# EAGLE board led_board_robot_vs_v2_final (EAGLE 8.0.1)
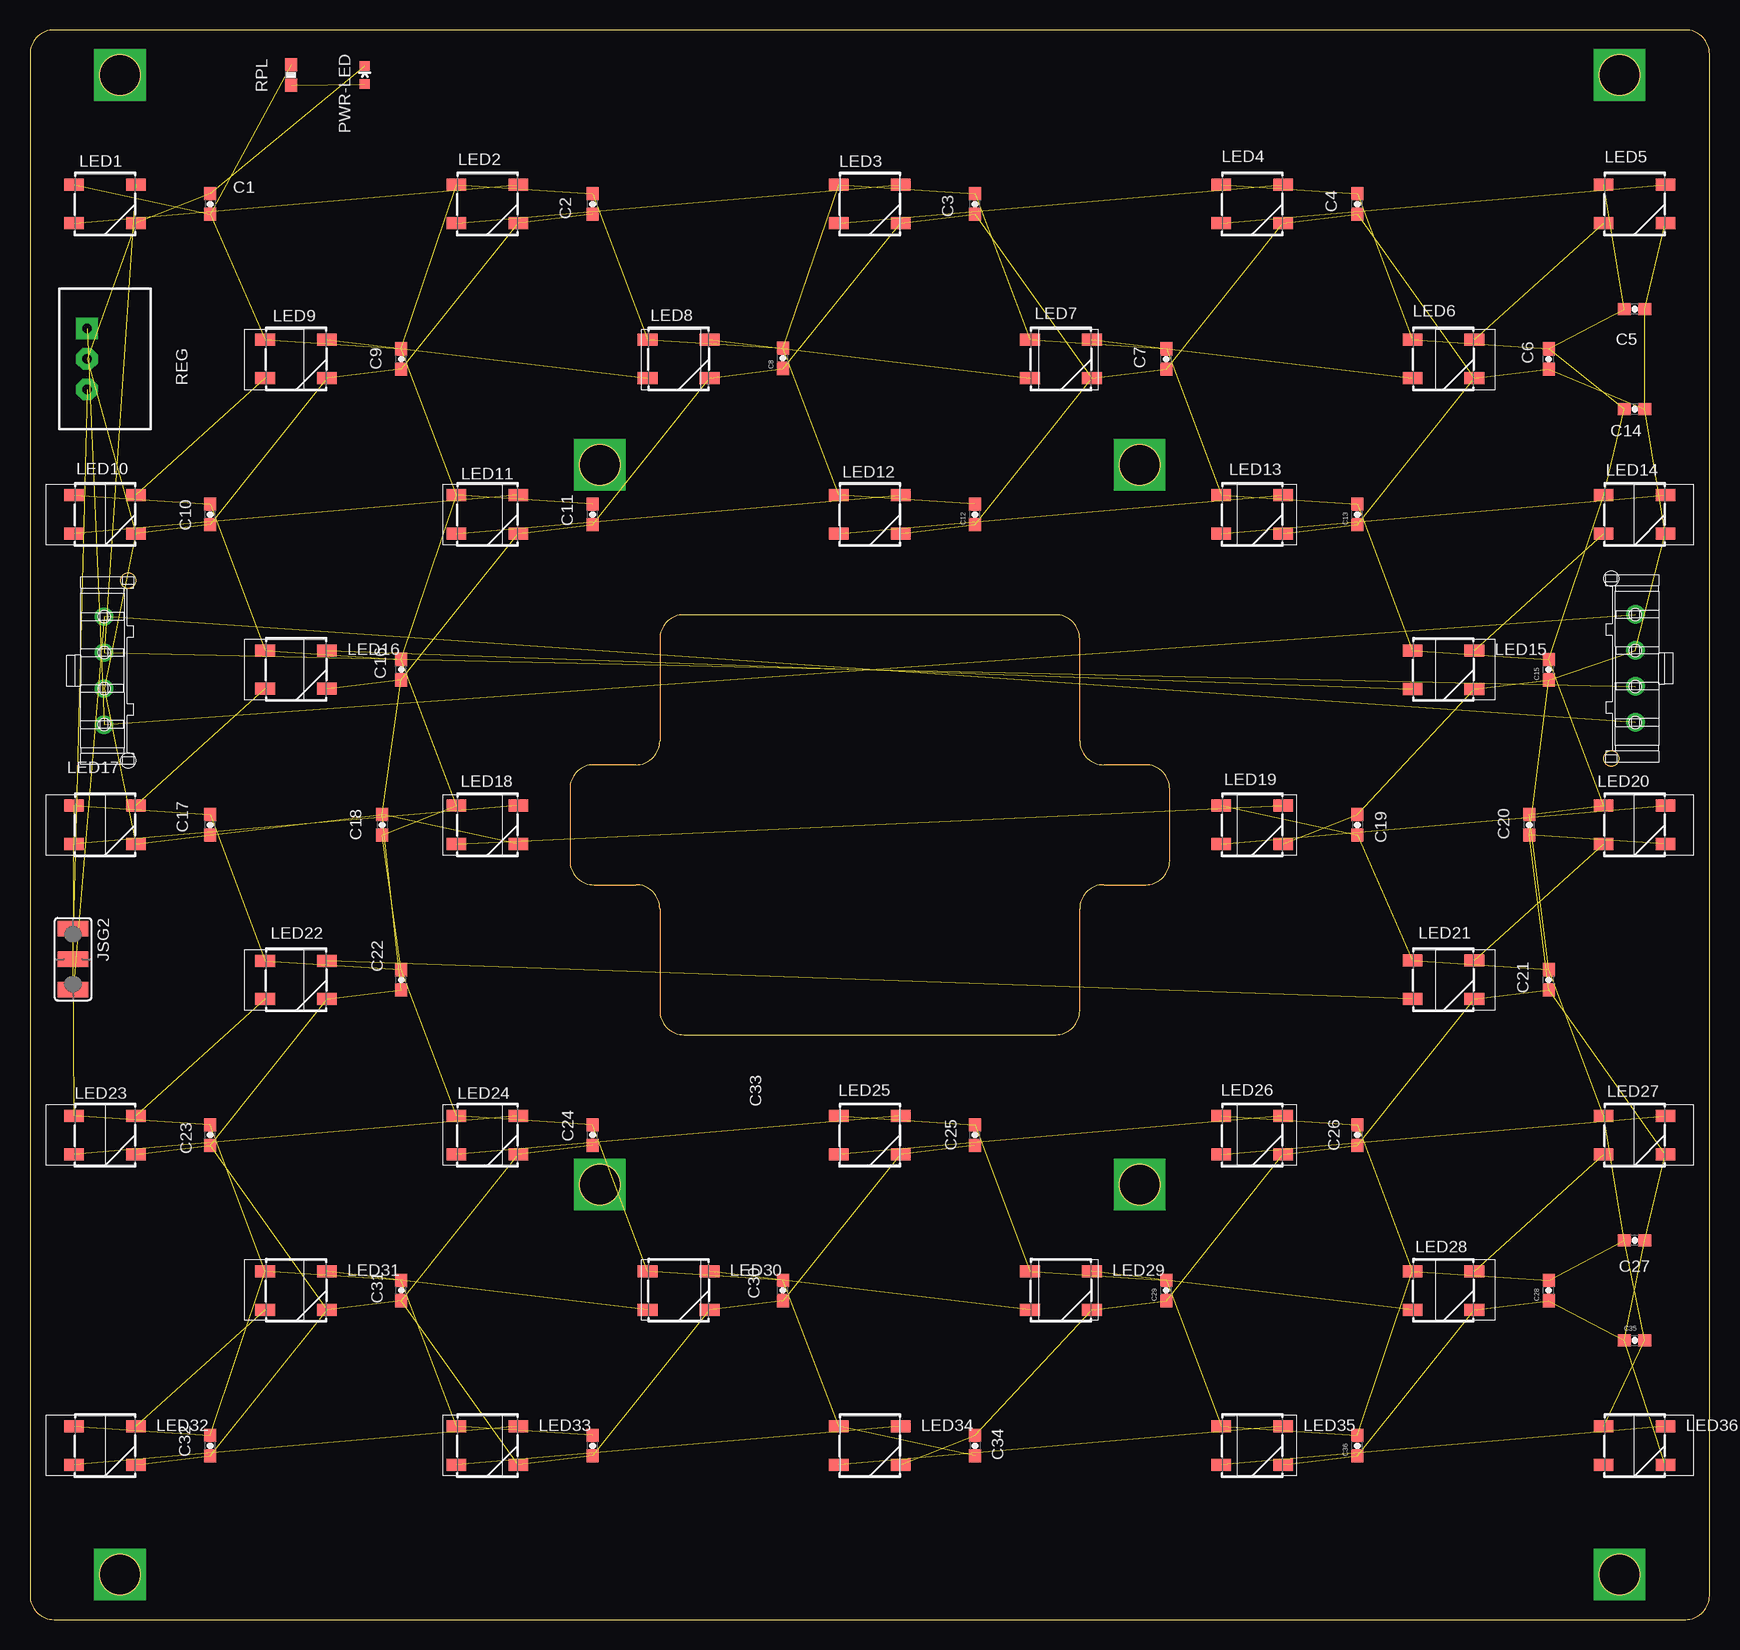
[diagram p0: board, top side]

Size 140 x 132.5 mm. Coordinates in mm from the lower left corner, seen from the top.
Outline: 2,0 138,0 arc90 140,2 140,130.5 arc90 138,132.5 2,132.5 arc90 0,130.5 0,2 arc90 2,0
Outline: 52.5,59.25 52.5,50.75 arc90 54.5,48.75 85.5,48.75 arc90 87.5,50.75 87.5,59.25 arc-90 89.5,61.25 93,61.25 arc90 95,63.25 95,69.25 arc90 93,71.25 89.5,71.25 arc-90 87.5,73.25 87.5,81.75 arc90 85.5,83.75 54.5,83.75 arc90 52.5,81.75 52.5,73.25 arc-90 50.5,71.25 47,71.25 arc90 45,69.25 45,63.25 arc90 47,61.25 50.5,61.25 arc-90 52.5,59.25
Outline: circle at 132.5,128.75 radius 1.7
Outline: circle at 7.5,3.75 radius 1.7
Outline: circle at 7.5,128.75 radius 1.7
Outline: circle at 132.5,3.75 radius 1.7
Outline: circle at 47.5,96.25 radius 1.7
Outline: circle at 47.5,36.25 radius 1.7
Outline: circle at 92.5,96.25 radius 1.7
Outline: circle at 92.5,36.25 radius 1.7
Outline: circle at 47.5,96.25 radius 1.7
Outline: circle at 92.5,36.25 radius 1.7
Outline: circle at 92.5,96.25 radius 1.7
Outline: circle at 47.5,36.25 radius 1.7
Copper layers (1*16): Top 0.035mm / dielectric 1.5mm / Bottom 0.035mm
Design rules "default": minimum track width 10mil, minimum drill 24mil, track to track 8mil, track to pad 8mil, pad to pad 8mil, via to via 8mil, smd to smd 8mil, copper to edge 40mil, drill to drill 8mil, minimum pad ring 10mil, minimum via ring 8mil, stop-mask expansion 4mil, vias tented up to drill 0mil, thermal gap 10mil
Net classes: 0 default: width 0.762 mm, drill 0.762 mm, clearance 0.559 mm; 1 power: width 0.762 mm, drill 0.762 mm, clearance 0.381 mm; 2 Massa: width 0.8 mm, drill 0.6 mm, clearance 0.2 mm; 3 Mot: width 1.2 mm, drill 0.8 mm, clearance 0.005 mm; 4 motor: width 0.305 mm, drill 0.406 mm, clearance 0.203 mm

## Footprints (pad centres in the part's own frame; a part is rotated, then mirrored left to right if it is on the bottom)
0603-CAP = smd 1.1 x 1: 1 -0.85,0; 2 0.85,0
MOLEX_LOCKING_4PIN = drill 1.02: 1 -4.593,0.08; 2 -1.591,0.08; 3 1.41,0.08; 4 4.412,0.08
SJ_2W = smd 1.27 x 2.54: 1 -2.54,0; 2 0,0; 3 2.54,0
WS2812B = smd 1.651 x 1: 1 -2.577,1.6; 2 -2.577,-1.6; 3 2.577,-1.6; 4 2.577,1.6
LED-0603 = smd 0.8 x 0.8: A 0,-0.75; C 0,0.75
TSR-1 = drill 0.8 pad 1.8 square: 1 -2.54,-1.5 | drill 0.8 pad 1.8 octagon: 2 0,-1.5; 3 2.54,-1.5
0603-RES = smd 1.1 x 1: 1 -0.85,0; 2 0.85,0

## Placement (x,y rotation side)
C1  0.1uF  [0603-CAP]  15.02,118 270 top
C2  0.1uF  [0603-CAP]  46.9,118 90 top
C3  0.1uF  [0603-CAP]  78.77,118 90 top
C4  0.1uF  [0603-CAP]  110.64,118 90 top
C5  0.1uF  [0603-CAP]  133.75,109.23 180 top
C6  0.1uF  [0603-CAP]  126.59,105.07 90 top
C7  0.1uF  [0603-CAP]  94.71,105.07 90 top
C8  0.1uF  [0603-CAP]  62.76,105.14 90 top
C9  0.1uF  [0603-CAP]  30.95,105.07 90 top
C10  0.1uF  [0603-CAP]  15.02,92.12 90 top
C11  0.1uF  [0603-CAP]  46.9,92.12 90 top
C12  0.1uF  [0603-CAP]  78.77,92.12 90 top
C13  0.1uF  [0603-CAP]  110.64,92.12 90 top
C14  0.1uF  [0603-CAP]  133.75,100.89 180 top
C15  0.1uF  [0603-CAP]  126.59,79.18 90 top
C16  0.1uF  [0603-CAP]  30.95,79.19 90 top
C17  0.1uF  [0603-CAP]  15.02,66.25 90 top
C18  0.1uF  [0603-CAP]  29.35,66.25 270 top
C19  0.1uF  [0603-CAP]  110.64,66.25 270 top
C20  0.1uF  [0603-CAP]  124.98,66.25 90 top
C21  0.1uF  [0603-CAP]  126.59,53.32 90 top
C22  0.1uF  [0603-CAP]  30.95,53.32 90 top
C23  0.1uF  [0603-CAP]  15.02,40.38 90 top
C24  0.1uF  [0603-CAP]  46.9,40.38 90 top
C25  0.1uF  [0603-CAP]  78.77,40.38 90 top
C26  0.1uF  [0603-CAP]  110.64,40.38 90 top
C27  0.1uF  [0603-CAP]  133.75,31.61 180 top
C28  0.1uF  [0603-CAP]  126.59,27.43 90 top
C29  0.1uF  [0603-CAP]  94.71,27.43 90 top
C30  0.1uF  [0603-CAP]  62.76,27.43 90 top
C31  0.1uF  [0603-CAP]  30.95,27.43 90 top
C32  0.1uF  [0603-CAP]  15.02,14.5 90 top
C33  0.1uF  [0603-CAP]  46.9,14.5 90 top
C34  0.1uF  [0603-CAP]  78.77,14.5 270 top
C35  0.1uF  [0603-CAP]  133.75,23.27 0 top
C36  0.1uF  [0603-CAP]  110.64,14.5 90 top
CON1  MOLEX_LOCKING_4PIN  [MOLEX_LOCKING_4PIN]  133.75,79.19 270 top
CON2  MOLEX_LOCKING_4PIN  [MOLEX_LOCKING_4PIN]  6.25,79.19 90 top
JSG2  [SJ_2W]  3.58,55.04 270 top
LED1  WS2812B  [WS2812B]  6.25,118 0 top
LED2  WS2812B  [WS2812B]  38.12,118 0 top
LED3  WS2812B  [WS2812B]  70,118 0 top
LED4  WS2812B  [WS2812B]  101.88,118 0 top
LED5  WS2812B  [WS2812B]  133.75,118 0 top
LED6  WS2812B  [WS2812B]  117.82,105.07 0 top
LED7  WS2812B  [WS2812B]  85.94,105.07 0 top
LED8  WS2812B  [WS2812B]  54.06,105.07 0 top
LED9  WS2812B  [WS2812B]  22.18,105.07 0 top
LED10  WS2812B  [WS2812B]  6.25,92.12 0 top
LED11  WS2812B  [WS2812B]  38.12,92.12 0 top
LED12  WS2812B  [WS2812B]  70,92.12 0 top
LED13  WS2812B  [WS2812B]  101.88,92.12 0 top
LED14  WS2812B  [WS2812B]  133.75,92.12 0 top
LED15  WS2812B  [WS2812B]  117.82,79.18 0 top
LED16  WS2812B  [WS2812B]  22.18,79.19 0 top
LED17  WS2812B  [WS2812B]  6.25,66.25 0 top
LED18  WS2812B  [WS2812B]  38.12,66.25 0 top
LED19  WS2812B  [WS2812B]  101.88,66.25 0 top
LED20  WS2812B  [WS2812B]  133.75,66.25 0 top
LED21  WS2812B  [WS2812B]  117.82,53.32 0 top
LED22  WS2812B  [WS2812B]  22.18,53.31 0 top
LED23  WS2812B  [WS2812B]  6.25,40.38 0 top
LED24  WS2812B  [WS2812B]  38.12,40.38 0 top
LED25  WS2812B  [WS2812B]  70,40.38 0 top
LED26  WS2812B  [WS2812B]  101.88,40.38 0 top
LED27  WS2812B  [WS2812B]  133.75,40.38 0 top
LED28  WS2812B  [WS2812B]  117.82,27.43 0 top
LED29  WS2812B  [WS2812B]  85.94,27.43 0 top
LED30  WS2812B  [WS2812B]  54.06,27.43 0 top
LED31  WS2812B  [WS2812B]  22.18,27.43 0 top
LED32  WS2812B  [WS2812B]  6.25,14.5 0 top
LED33  WS2812B  [WS2812B]  38.12,14.5 0 top
LED34  WS2812B  [WS2812B]  70,14.5 0 top
LED35  WS2812B  [WS2812B]  101.88,14.5 0 top
LED36  WS2812B  [WS2812B]  133.75,14.5 0 top
PWR-LED  Amber  [LED-0603]  27.9,128.75 0 top
REG  TSR1-2450  [TSR-1]  6.25,105.07 270 top
RPL  1K  [0603-RES]  21.75,128.75 90 top

## Library data of the parts
C1-C36 PWR-LED RPL = SparkFun
CON1 CON2 = molex_connector; PARTNO: 43650-0415
JSG2 = jumper
LED1-LED36 = SparkFun-LED; PROD_ID: DIO-12503
REG = SteelCaveRobotics-Power

## Nets
5V-CONTROLLER [power]: CON1.4 CON2.4 JSG2.3
5V-FROM-CONVERTER [power]: JSG2.1 REG.3
12V-SUPPLY [power]: CON1.1 CON2.1 REG.1
D11_MICRO [power]: CON1.3 CON2.3 LED1.4
DO_1: LED1.2 LED2.4
DO_2 [power]: LED2.2 LED3.4
DO_3 [power]: LED3.2 LED4.4
DO_4 [power]: LED4.2 LED5.4
DO_5 [power]: LED5.2 LED6.4
DO_6 [power]: LED6.2 LED7.4
DO_7 [power]: LED7.2 LED8.4
DO_8: LED8.2 LED9.4
DO_9: LED9.2 LED10.4
DO_10: LED10.2 LED11.4
DO_11 [power]: LED11.2 LED12.4
DO_14 [power]: LED12.2 LED13.4
DO_15 [power]: LED13.2 LED14.4
DO_16 [power]: LED14.2 LED15.4
DO_17 [power]: LED15.2 LED16.4
DO_18 [power]: LED16.2 LED17.4
DO_19: LED17.2 LED18.4
DO_22 [power]: LED18.2 LED19.4
DO_23 [power]: LED19.2 LED20.4
DO_24 [power]: LED20.2 LED21.4
DO_25 [power]: LED21.2 LED22.4
DO_26 [power]: LED22.2 LED23.4
DO_27 [power]: LED23.2 LED24.4
DO_28: LED24.2 LED25.4
DO_29: LED25.2 LED26.4
DO_30: LED26.2 LED27.4
DO_31: LED27.2 LED28.4
DO_32 [power]: LED28.2 LED29.4
DO_33 [power]: LED29.2 LED30.4
DO_34 [power]: LED30.2 LED31.4
DO_35 [power]: LED31.2 LED32.4
DO_36: LED32.2 LED33.4
DO_37: LED33.2 LED34.4
DO_38: LED34.2 LED35.4
DO_39: LED35.2 LED36.4
DO_40 [power]: LED36.2
GND [power]: C1.1 C2.1 C3.1 C4.1 C5.1 C6.1 C7.1 C8.1 C9.1 C10.1 C11.1 C12.1 C13.1 C14.1 C15.1 C16.1 C17.1 C18.1 C19.1 C20.1 C21.1 C22.1 C23.1 C24.1 C25.1 C26.1 C27.1 C28.1 C29.1 C30.1 C31.1 C32.1 C33.1 C34.1 C35.1 C36.1 CON1.2 CON2.2 LED1.3 LED2.3 LED3.3 LED4.3 LED5.3 LED6.3 LED7.3 LED8.3 LED9.3 LED10.3 LED11.3 LED12.3 LED13.3 LED14.3 LED15.3 LED16.3 LED17.3 LED18.3 LED19.3 LED20.3 LED21.3 LED22.3 LED23.3 LED24.3 LED25.3 LED26.3 LED27.3 LED28.3 LED29.3 LED30.3 LED31.3 LED32.3 LED33.3 LED34.3 LED35.3 LED36.3 PWR-LED.C REG.2
N$17: PWR-LED.A RPL.1
VCC [power]: C1.2 C2.2 C3.2 C4.2 C5.2 C6.2 C7.2 C8.2 C9.2 C10.2 C11.2 C12.2 C13.2 C14.2 C15.2 C16.2 C17.2 C18.2 C19.2 C20.2 C21.2 C22.2 C23.2 C24.2 C25.2 C26.2 C27.2 C28.2 C29.2 C30.2 C31.2 C32.2 C33.2 C34.2 C35.2 C36.2 JSG2.2 LED1.1 LED2.1 LED3.1 LED4.1 LED5.1 LED6.1 LED7.1 LED8.1 LED9.1 LED10.1 LED11.1 LED12.1 LED13.1 LED14.1 LED15.1 LED16.1 LED17.1 LED18.1 LED19.1 LED20.1 LED21.1 LED22.1 LED23.1 LED24.1 LED25.1 LED26.1 LED27.1 LED28.1 LED29.1 LED30.1 LED31.1 LED32.1 LED33.1 LED34.1 LED35.1 LED36.1 RPL.2

## Tracks (layer width: path | path; a pad name or v marks a point on that pad's centre or on a via)
5V-CONTROLLER  (2 unrouted)
5V-FROM-CONVERTER  (1 unrouted)
12V-SUPPLY  (2 unrouted)
D11_MICRO  (2 unrouted)
DO_1  (1 unrouted)
DO_2  (1 unrouted)
DO_3  (1 unrouted)
DO_4  (1 unrouted)
DO_5  (1 unrouted)
DO_6  (1 unrouted)
DO_7  (1 unrouted)
DO_8  (1 unrouted)
DO_9  (1 unrouted)
DO_10  (1 unrouted)
DO_11  (1 unrouted)
DO_14  (1 unrouted)
DO_15  (1 unrouted)
DO_16  (1 unrouted)
DO_17  (1 unrouted)
DO_18  (1 unrouted)
DO_19  (1 unrouted)
DO_22  (1 unrouted)
DO_23  (1 unrouted)
DO_24  (1 unrouted)
DO_25  (1 unrouted)
DO_26  (1 unrouted)
DO_27  (1 unrouted)
DO_28  (1 unrouted)
DO_29  (1 unrouted)
DO_30  (1 unrouted)
DO_31  (1 unrouted)
DO_32  (1 unrouted)
DO_33  (1 unrouted)
DO_34  (1 unrouted)
DO_35  (1 unrouted)
DO_36  (1 unrouted)
DO_37  (1 unrouted)
DO_38  (1 unrouted)
DO_39  (1 unrouted)
GND  (75 unrouted)
N$1  (via drill 3.3 pad 3.4)
  other vias: 7.5,128.75
N$2  (via drill 3.3)
  other vias: 7.5,3.75
N$3  (via drill 3.3)
  other vias: 132.5,3.75
N$4  (via drill 3.3)
  other vias: 132.5,128.75
N$5  (via drill 3.3 pad 3.4)
  other vias: 47.5,96.25
N$6  (via drill 3.3 pad 3.4)
  other vias: 92.5,36.25
N$7  (via drill 3.3 pad 3.4)
  other vias: 92.5,96.25
N$8  (via drill 3.3 pad 3.4)
  other vias: 47.5,36.25
N$17  (1 unrouted)
VCC  (73 unrouted)

## Text on the board
Document: LED_BOARD_ROBOT_VS_V2 | LED_BOARD_ROBOT_VS_V2